# Altium PCB WristPcb.PcbDoc
Units mm, origin at the board's own origin, x right, y up, seen from the top; angles counter-clockwise.
Board outline 152.4 x 101.6 mm, 2 copper layers (Top Layer, Bottom Layer); 4 components, 45 nets, 73 pads, 0 vias.
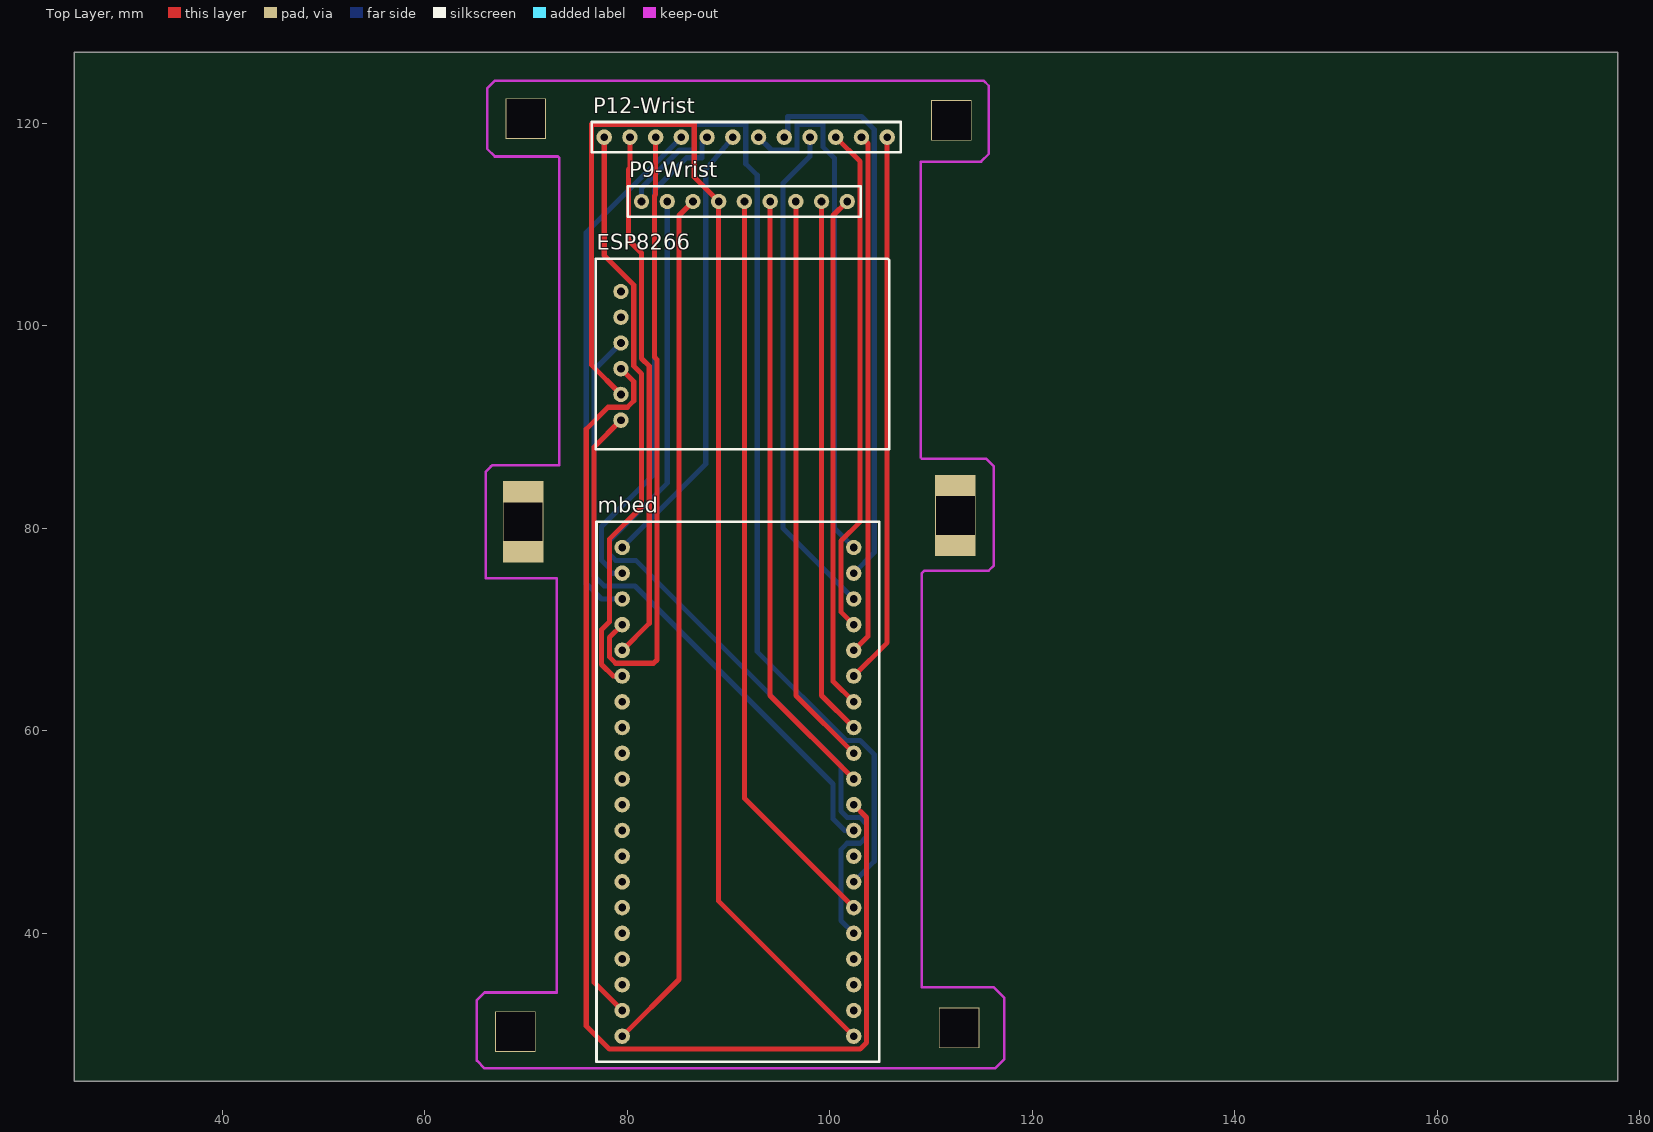
[diagram p0: Top Layer view]
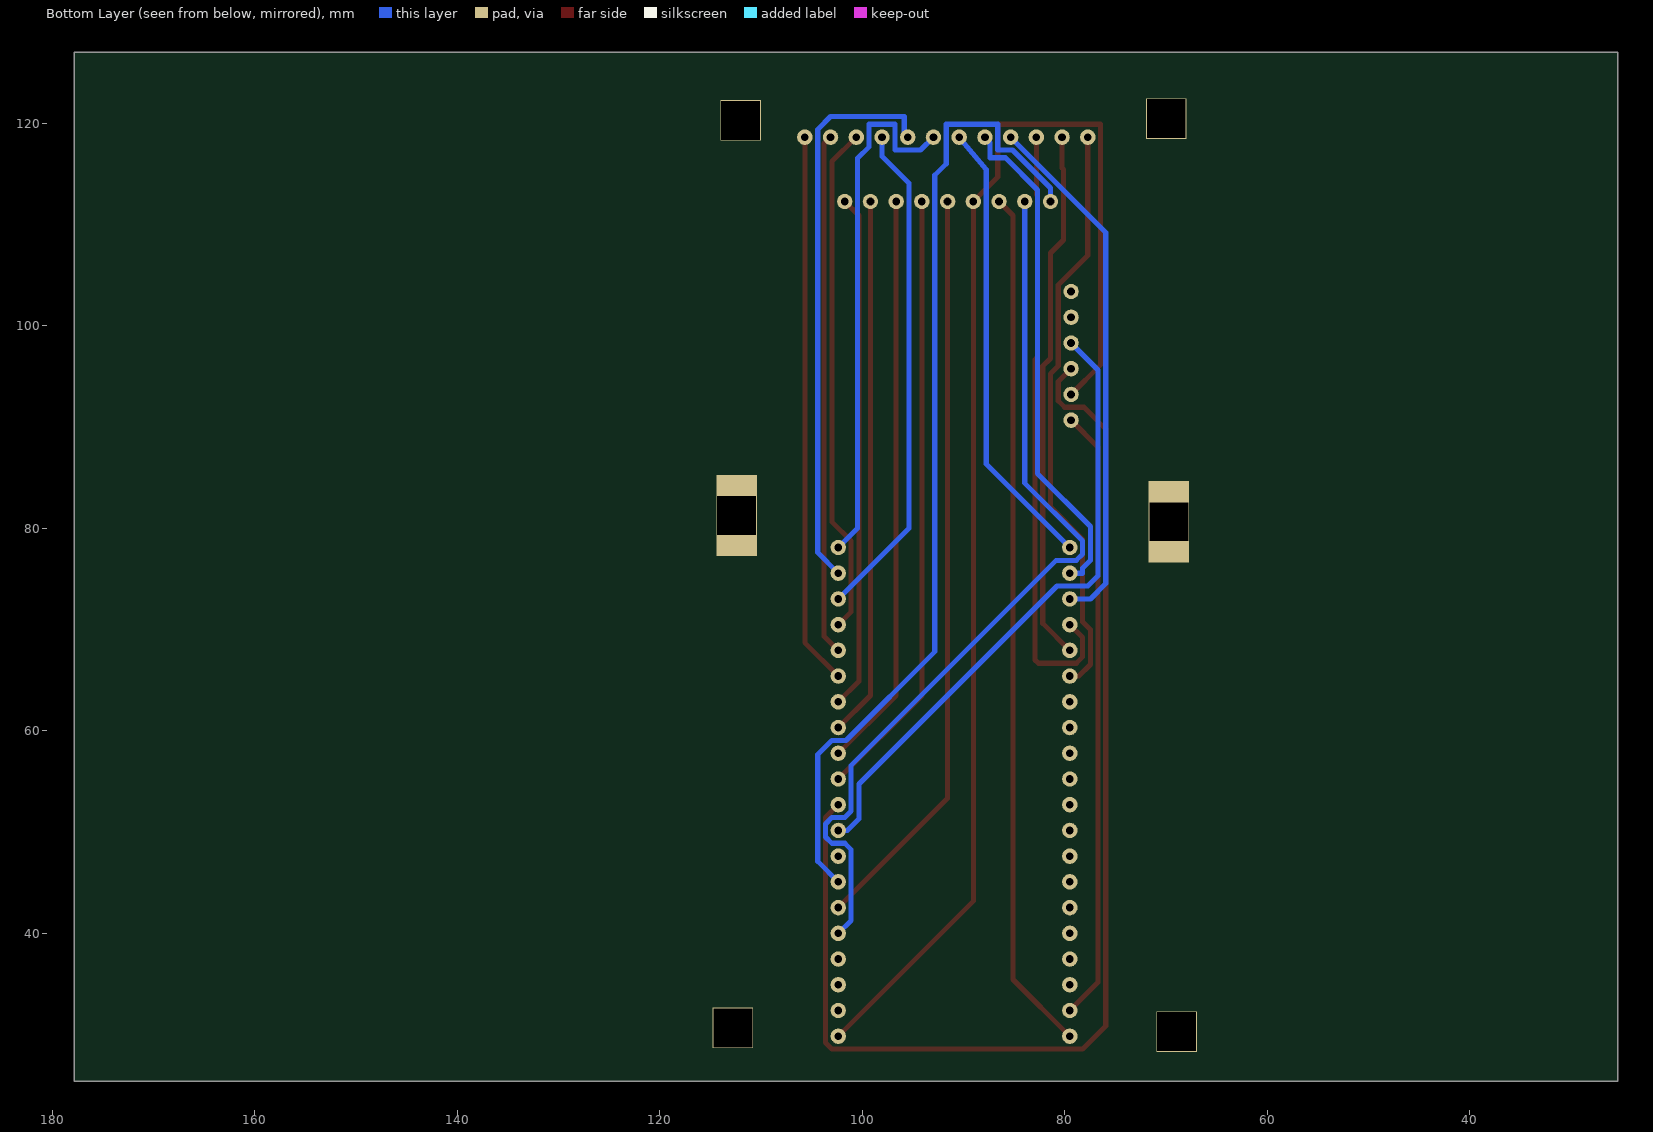
[diagram p1: Bottom Layer view, seen from below]

## Layer stack, top to bottom
Top Solder: solder mask 0.0102, Solder Resist, Dk 3.5
Top Layer: signal copper 0.0356
Dielectric 1: dielectric 0.32, FR-4, Dk 4.8
Bottom Layer: signal copper 0.0356
Bottom Solder: solder mask 0.0102, Solder Resist, Dk 3.5

## Board outline
25.4,25.4 177.8,25.4 177.8,127 25.4,127

## Design rules (kind name [scope] priority, off if disabled: settings)
Clearance [All] p1: gap=0.254 ignorepadtopadclearanceinfootprint=FALSE except(0: Arc-Hole Track-Hole SMDPad-Hole THPad-Hole Via-Hole Fill-Hole Poly-Hole Region-Hole Text-Hole)
PolygonConnect [All] p1: connectstyle=Relief reliefconductorwidth=0.254 reliefentries=4 polygonreliefangle="90 Angle" airgapwidth=0.254
RoutingVias [All] p1: holewidth=0.711 width=1.27 viastyle="Through Hole" minholewidth=0.711 minwidth=1.27 maxholewidth=0.711 maxwidth=1.27
SolderMaskExpansion [All] p1: expansion=0.102 istentingtop=FALSE
Width [All] p1: maxlimit=0.508 minlimit=0.508 preferedwidth=0.508 minimp=50.000000 maximp=50.000000 favimp=50.000000
30 further rules are at their usual default settings.

## Components (designator, comment, footprint, x,y, rotation, side; value= is the part's Value field where it differs from the comment)
ESP8266 "ESP8266" ESP8266 79.375,98.298 r0 top
mbed "mbed" Mbed 102.362,29.845 r180 top
P9-Wrist "9P" 9p 91.567,112.268 r0 top
P12-Wrist "12P" 12P 95.504,118.618 r180 top

## Footprints (in the part's own frame and the unit in brackets; to place one, negate y for a bottom-side part, rotate by r counter-clockwise, add the part's x,y. Pads: shape width x height; smd on the part's side, far side on the other; paste and mask are expansions set on the pad)
9p [mil]
  round 60 hole 30: 1(-400,0) 2(-300,0) 3(-200,0) 4(-100,0) 5(0,0) 6(100,0) 7(200,0) 8(300,0) 9(400,0)
  silkscreen extent -453,-59 453,59
12P [mil]
  round 60 hole 30: 1(-400,0) 2(-300,0) 3(-200,0) 4(-100,0) 5(0,0) 6(100,0) 7(200,0) 8(300,0) 9(400,0) 10(500,0) 11(600,0) 12(700,0)
  silkscreen extent -453,-59 748,59
ESP8266 [mil]
  round 60 hole 30: 1(0,-300) 2(0,-200) 3(0,-100) 4(0,0) 5(0,100) 6(0,200)
  silkscreen extent -98,-413 1043,328
Mbed [mil]
  round 60 hole 30: 1(0,0) 2(0,-100) 3(0,-200) 4(0,-300) 5(0,-400) 6(0,-500) 7(0,-600) 8(0,-700) 9(0,-800) 10(0,-900) 11(0,-1000) 12(0,-1100) 13(0,-1200) 14(0,-1300) 15(0,-1400) 16(0,-1500) 17(0,-1600) 18(0,-1700) 19(0,-1800) 20(0,-1900) 21(900,-1900) 22(900,-1800) 23(900,-1700) 24(900,-1600) 25(900,-1500) 26(900,-1400) 27(900,-1300) 28(900,-1200) 29(900,-1100) 30(900,-1000) 31(900,-900) 32(900,-800) 33(900,-700) 34(900,-600) 35(900,-500) 36(900,-400) 37(900,-300) 38(900,-200) 39(900,-100) 40(900,0)
  silkscreen extent -100,-2000 1000,100

## Free pads (board coordinates)
  rect 4x4 hole 3.8 square: 2(68.961,30.29) 2(69.977,120.459) 2(112.014,120.269) 2(112.776,30.67)
  rect 4x8 hole 3.8 square: 2(69.723,80.645) 2(112.395,81.28)

## Nets (pads, with @x,y where several pads share a name; then routed paths per layer and width w, separated by ;. In a path a pad name is that pad's centre, name@x,y a point inside that pad or via, vN(x,y) a via of type N, cw(c..) or ccw(c..) an arc to the next point about the centre after c; other vN are vias at no path point)
1: mbed.7 P9-Wrist.1 | length 97.4
  Bottom Layer w0.508: P9-Wrist.1 81.407,113.603 85.152,117.348 86.614,117.348 86.614,119.888 91.694,119.888 91.694,116.002 92.837,114.859 92.837,67.818 101.6,59.055 102.997,59.055 104.394,57.658 104.394,47.117 mbed.7
2: mbed.5 P9-Wrist.2 | length 89.4
  Bottom Layer w0.508: P9-Wrist.2 83.947,84.455 78.232,78.74 78.232,77.47 78.867,76.835 80.848,76.835 101.092,56.591 101.092,52.07 101.727,51.435 102.997,51.435 103.632,50.8 103.632,49.53 102.997,48.895 101.727,48.895 101.092,48.26 101.092,41.275 mbed.5
3: mbed.40 P9-Wrist.3 | length 85.3
  Top Layer w0.508: mbed.40 85.115,35.458 85.115,110.896 P9-Wrist.3
4: ESP8266.2 mbed.1 P9-Wrist.4 | length 134.6
  Top Layer w0.508: ESP8266.2 76.454,96.139 76.454,119.888 86.614,119.888 86.614,114.681 P9-Wrist.4 89.027,43.18 mbed.1
5: mbed.6 P9-Wrist.5 | length 74.2
  Top Layer w0.508: P9-Wrist.5 91.567,53.34 mbed.6
9p1: mbed.11 P9-Wrist.6 | length 60.4
  Top Layer w0.508: P9-Wrist.6 94.107,63.5 mbed.11
9p2: mbed.12 P9-Wrist.7 | length 56.9
  Top Layer w0.508: P9-Wrist.7 96.647,63.5 mbed.12
9p3: mbed.13 P9-Wrist.8 | length 53.3
  Top Layer w0.508: P9-Wrist.8 99.187,63.5 mbed.13
9p4: mbed.14 P9-Wrist.9 | length 50.8
  Top Layer w0.508: P9-Wrist.9 100.33,110.871 100.33,64.897 mbed.14
12p1: mbed.15 P12-Wrist.1 | length 54.6
  Top Layer w0.508: mbed.15 105.664,68.707 P12-Wrist.1
12p2: mbed.16 P12-Wrist.2 | length 51.5
  Top Layer w0.508: mbed.16 103.759,69.342 103.759,117.983 P12-Wrist.2
12p3: mbed.17 P12-Wrist.3 | length 50.4
  Top Layer w0.508: P12-Wrist.3 102.997,116.205 102.997,80.645 101.092,78.74 101.092,71.755 mbed.17
12p4: mbed.18 P12-Wrist.4 | length 49.6
  Bottom Layer w0.508: P12-Wrist.4 98.044,116.73 95.377,114.063 95.377,80.01 mbed.18
12p5: mbed.19 P12-Wrist.5 | length 55.9
  Bottom Layer w0.508: P12-Wrist.5 95.845,118.959 95.845,120.65 103.124,120.65 104.394,119.38 104.394,77.597 mbed.19
12p6: mbed.20 P12-Wrist.6 | length 52.5
  Bottom Layer w0.508: P12-Wrist.6 94.234,117.348 96.774,117.348 96.774,119.888 99.314,119.888 99.314,117.678 100.457,116.535 100.457,80.01 mbed.20
12p7: mbed.21 P12-Wrist.7 | length 44.9
  Bottom Layer w0.508: mbed.21 87.757,86.36 87.757,115.443 P12-Wrist.7
12p8: mbed.22 P12-Wrist.8 | length 49.8
  Bottom Layer w0.508: mbed.22 78.232,75.565 78.232,76.073 77.47,76.835 77.47,80.188 82.677,85.395 82.677,113.411 85.852,116.586 87.376,116.586 87.376,118.11 P12-Wrist.8
12p9: mbed.23 P12-Wrist.9 | length 52.1
  Bottom Layer w0.508: mbed.23 77.47,73.025 75.946,74.549 75.946,109.22 P12-Wrist.9
12p10: mbed.24 P12-Wrist.10 | length 60.6
  Top Layer w0.508: mbed.24 78.232,69.215 78.232,67.31 78.867,66.675 82.601,66.675 82.931,67.005 82.931,96.651 82.677,96.905 82.677,112.827 82.804,112.954 P12-Wrist.10
12p11: mbed.25 P12-Wrist.11 | length 52.7
  Top Layer w0.508: mbed.25 82.169,70.612 82.169,96.012 81.407,96.774 81.407,107.188 80.137,108.458 80.137,115.443 80.264,115.57 P12-Wrist.11
12p12: mbed.26 P12-Wrist.12 | length 57.7
  Top Layer w0.508: P12-Wrist.12 77.724,106.934 80.645,104.013 80.645,96.012 81.407,95.25 81.407,82.093 78.232,78.918 78.232,70.739 77.47,69.977 77.47,66.548 78.613,65.405 mbed.26
esp1: ESP8266.1 mbed.39 | length 60.6
  Top Layer w0.508: ESP8266.1 76.708,88.011 76.708,35.179 mbed.39
esp3: ESP8266.3 mbed.10 | length 121.4
  Top Layer w0.508: ESP8266.3 80.645,94.488 80.645,92.583 80.01,91.948 78.105,91.948 75.946,89.789 75.946,30.861 78.232,28.575 102.997,28.575 103.632,29.21 103.632,51.435 mbed.10
esp4: ESP8266.4 mbed.9 | length 62.2
  Bottom Layer w0.508: ESP8266.4 76.708,95.631 76.708,75.311 77.724,74.295 80.772,74.295 100.33,54.737 100.33,51.308 101.473,50.165 mbed.9
Netimu_1: 
Netimu_2: 
Netimu_3: 
Netimu_4: 
Netimu_6: 
Netimu_7: 
NetP1_6: 
NetP1_7: 
NetP1_8: 
NetP2_6: 
NetP2_7: 
NetP2_8: 
NetP3_6: 
NetP3_7: 
NetP3_8: 
NetP4_6: 
NetP4_7: 
NetP4_8: 
NetP5_6: 
NetP5_7: 
NetP5_8: 
pads on no net: ESP8266.5 ESP8266.6 mbed.2 mbed.3 mbed.4 mbed.8 mbed.27 mbed.28 mbed.29 mbed.30 mbed.31 mbed.32 mbed.33 mbed.34 mbed.35 mbed.36 mbed.37 mbed.38

## Keep-outs
Top Layer:
  lines w0.254: 73.152,124.206 114.935,124.206 115.189,124.206 115.697,123.698 115.697,116.967 114.935,116.205 108.966,116.205 108.966,115.189 108.966,86.995 109.093,86.868 115.443,86.868 116.205,86.106 116.205,76.327 115.697,75.819 115.443,75.819 114.427,75.819 109.347,75.819 109.093,75.565 109.093,34.671 116.205,34.671 117.221,33.655 117.221,27.559 116.332,26.67 115.189,26.67 65.913,26.67 65.151,27.432 65.151,33.401 65.913,34.163 73.025,34.163 73.025,75.057 66.04,75.057 66.04,85.598 66.548,86.106 66.675,86.233 73.279,86.233 73.279,116.586 73.152,116.713 66.929,116.713 66.167,117.475 66.167,123.444 66.929,124.206 73.406,124.206